# Altium PCB PCB_deskclok_ext_2021-02-23.pcbdoc
Units mil, origin at the board's own origin, x right, y up, seen from the top; angles counter-clockwise.
Board outline 1889.81 x 1925.91 mil, 2 copper layers (Top Layer, Bottom Layer); 36 components, 29 nets, 180 pads, 72 vias.
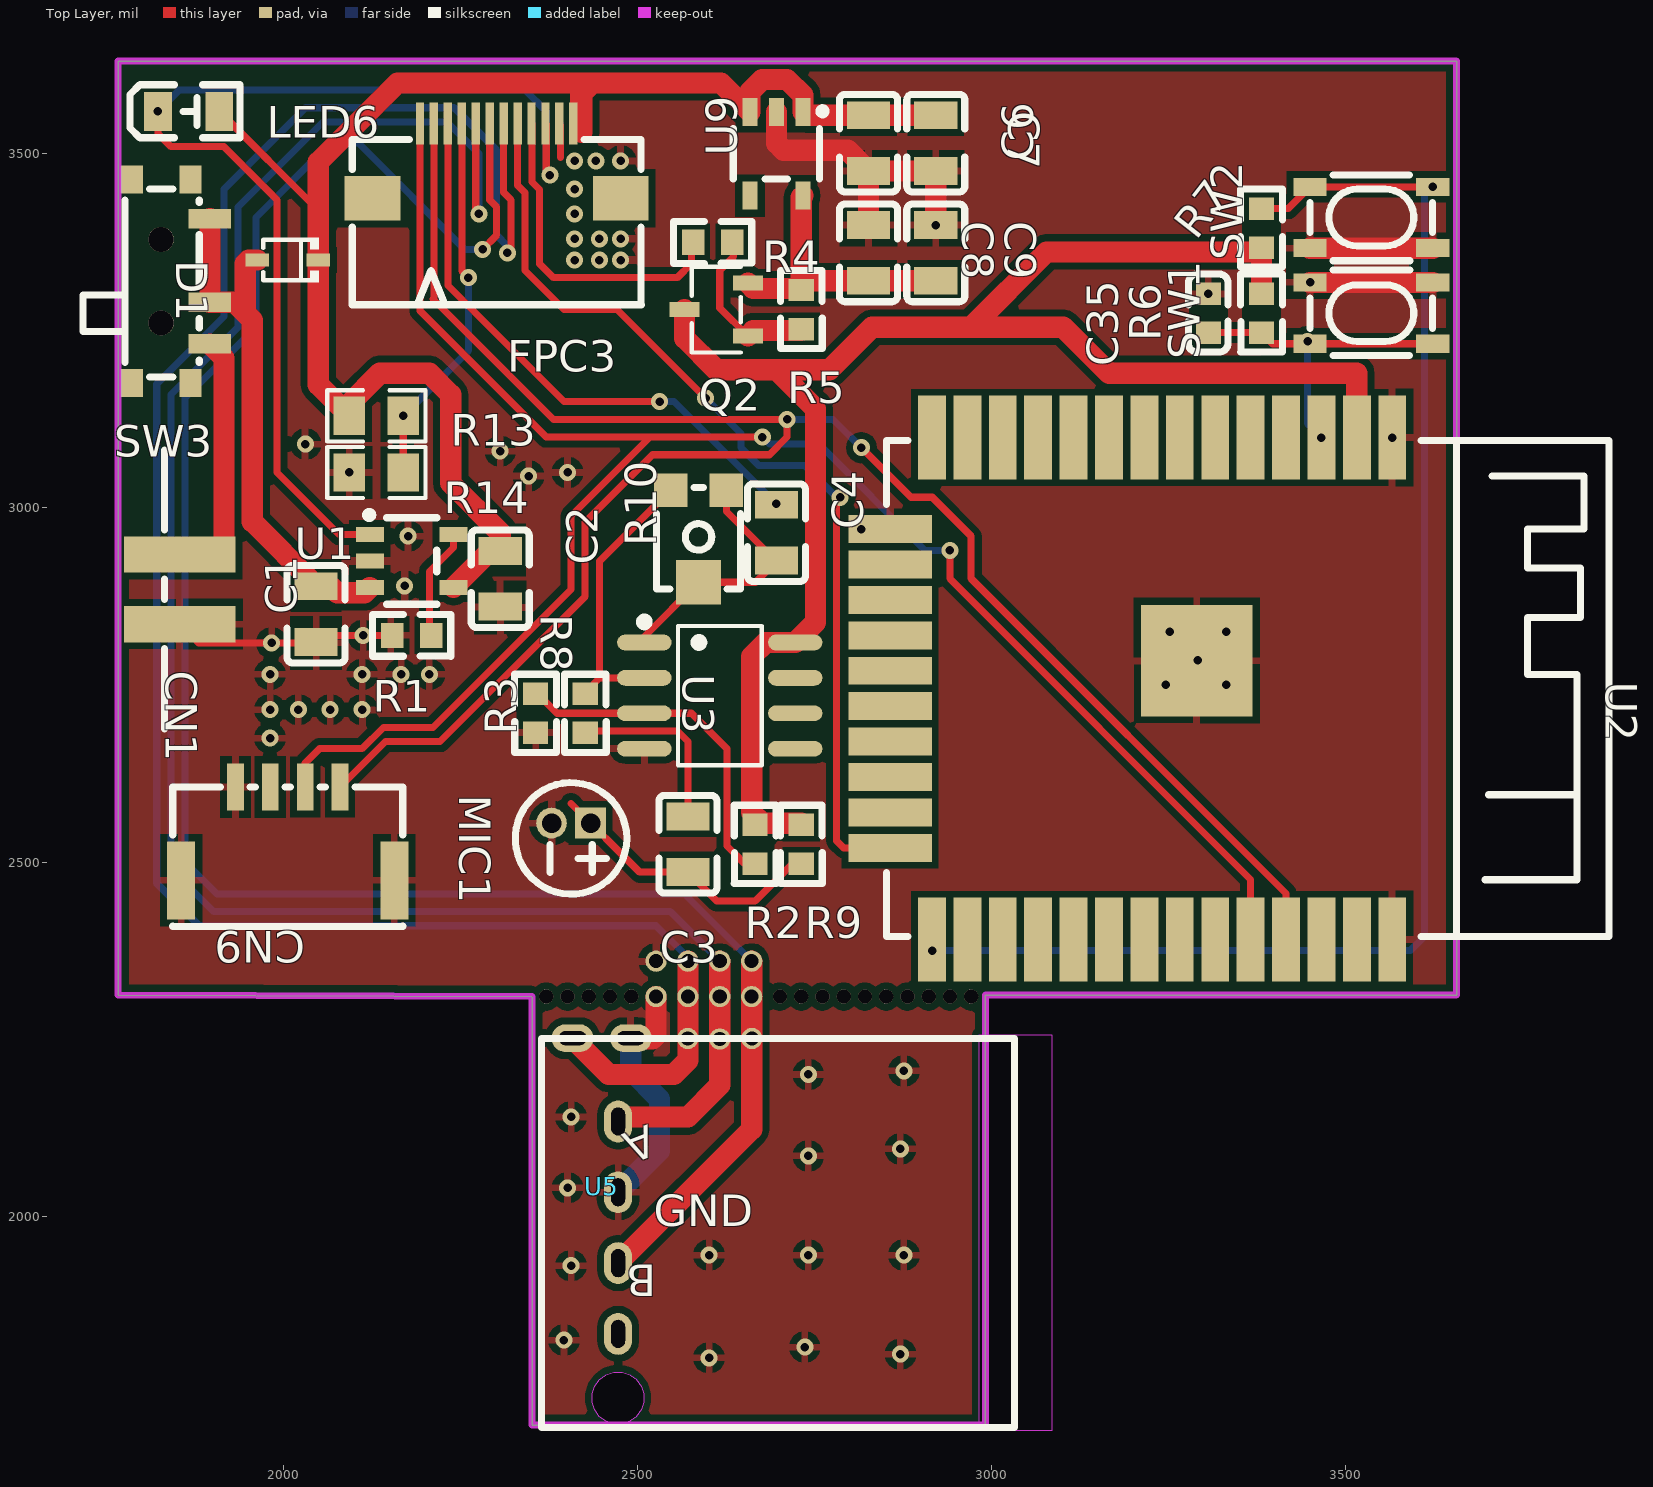
[diagram p0: Top Layer view]
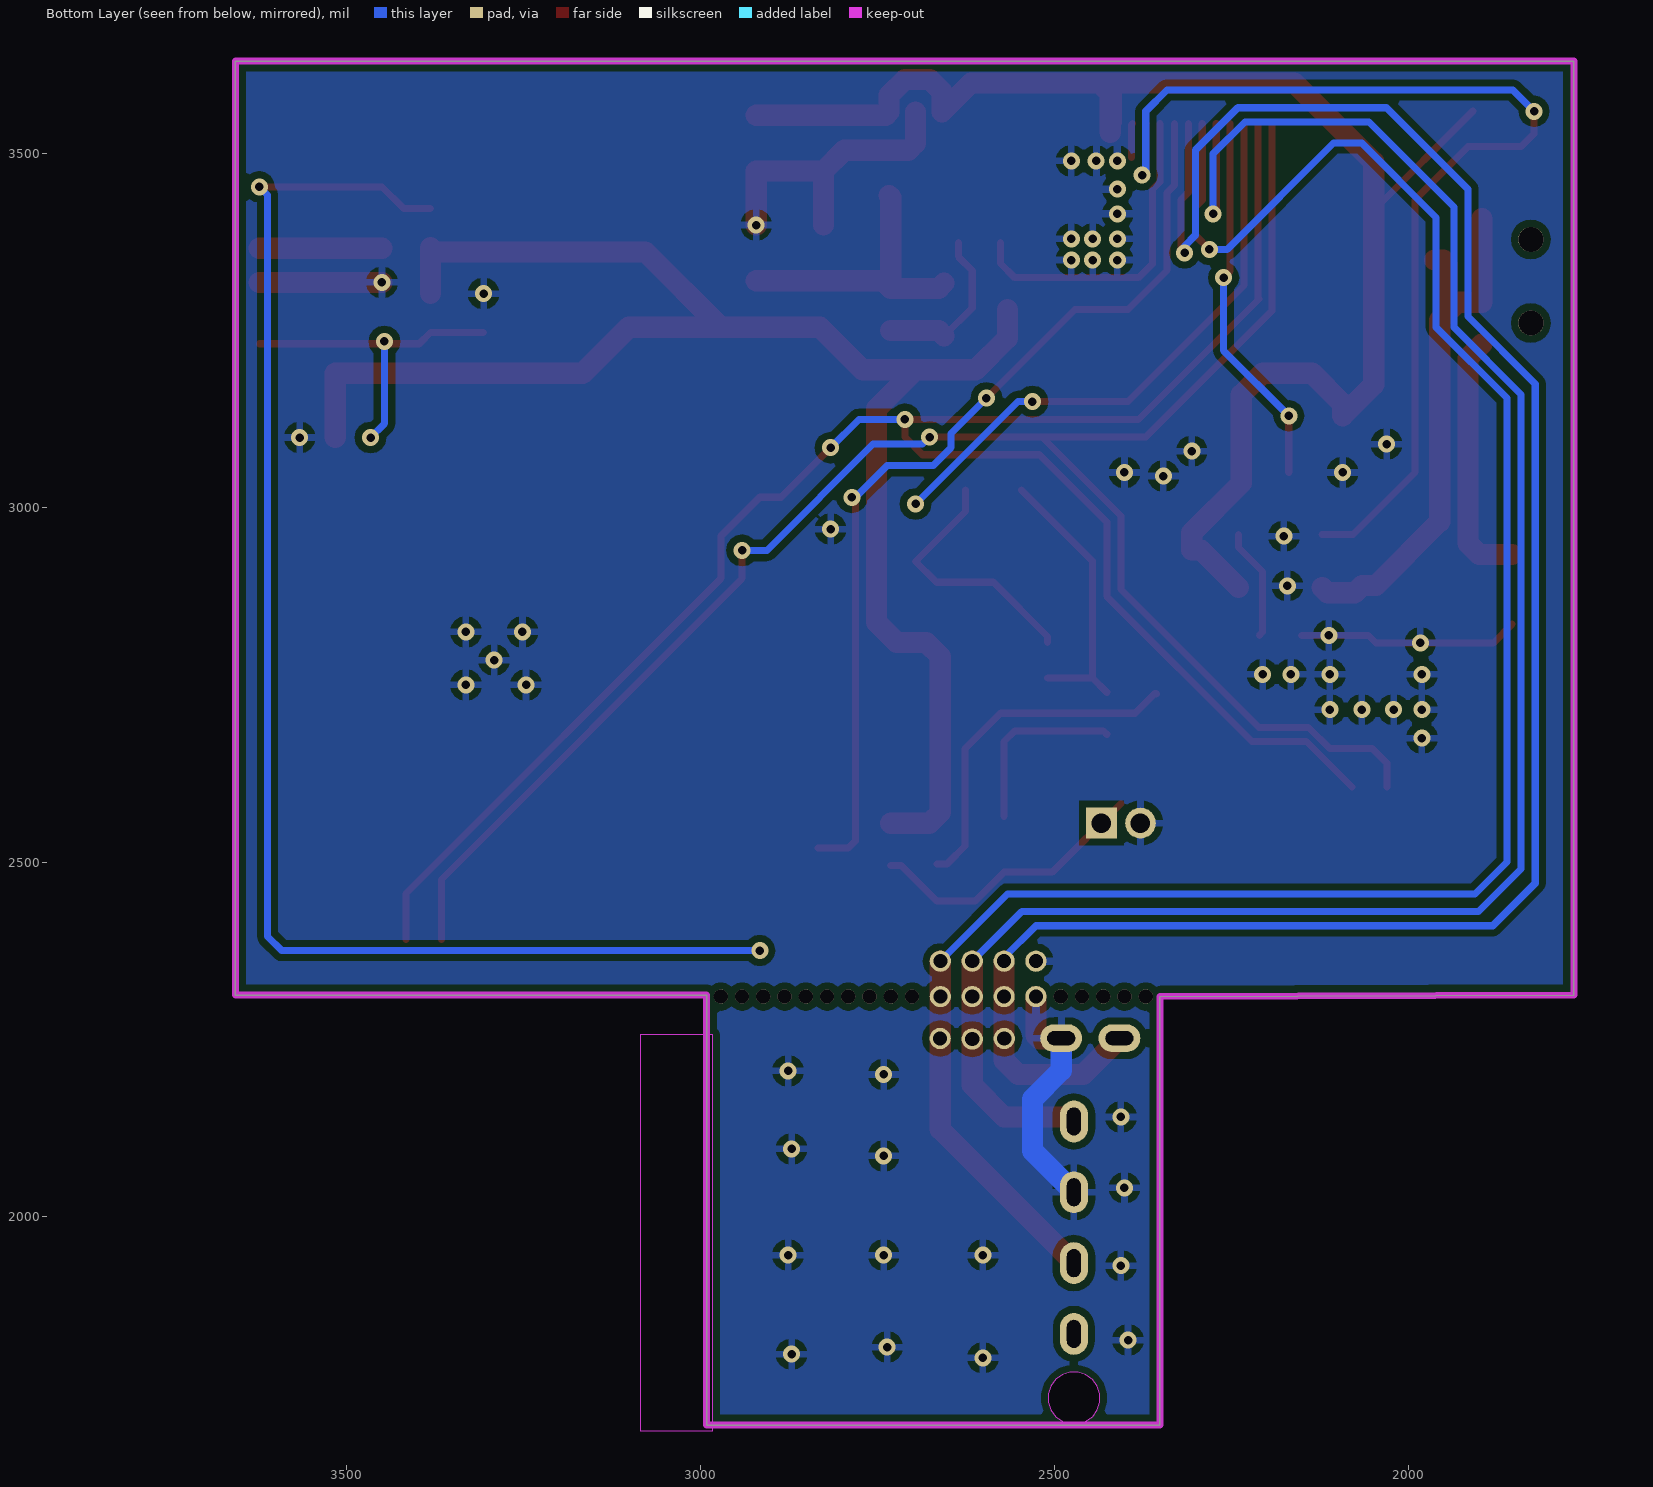
[diagram p1: Bottom Layer view, seen from below]
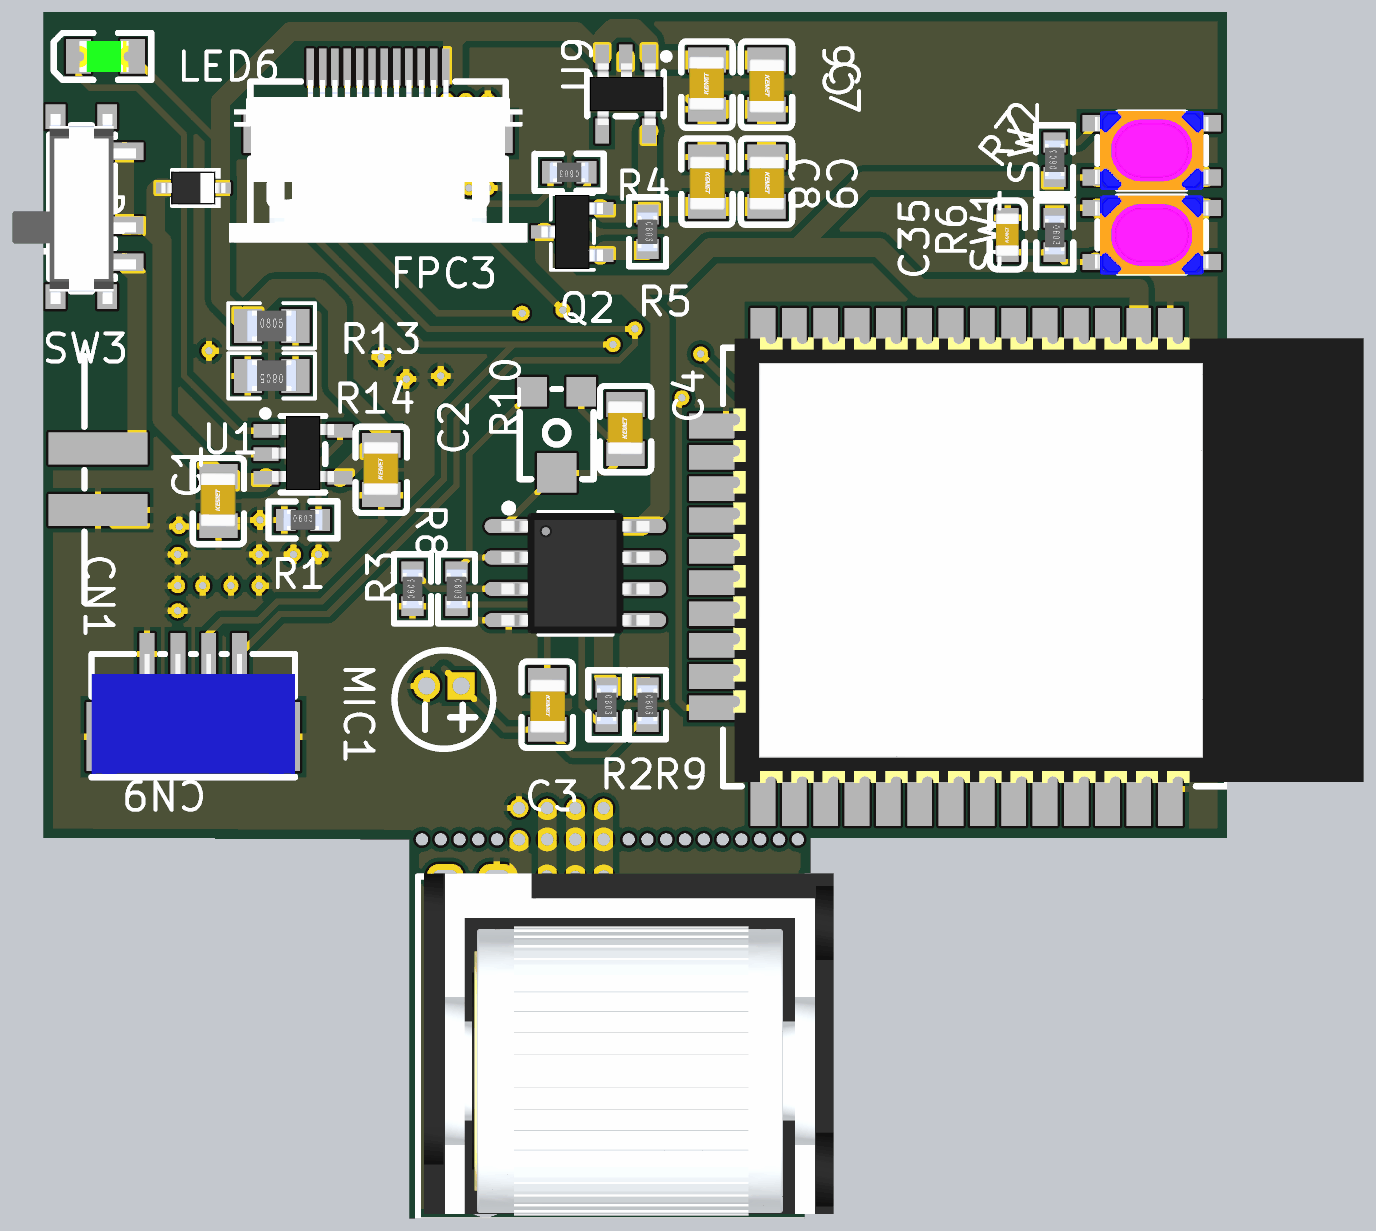
[diagram p2: 3D render of the assembled board from above, using the file's embedded part models]

## Layer stack, top to bottom
Top Solder: solder mask 0.4, Solder Resist, Dk 3.5
Top Layer: signal copper 1.4
Dielectric1: dielectric 12.6, FR-4, Dk 4.8
Bottom Layer: signal copper 1.4
Bottom Solder: solder mask 0.4, Solder Resist, Dk 3.5

## Board outline
1767.13,2312.01 2351.53,2310 2351.53,1705 2991.53,1705 2991.53,2312 3656.93,2312 3656.89,2312.01 3656.89,3630.91 1767.13,3630.91

## Design rules (kind name [scope] priority, off if disabled: settings)
Clearance [All] p1: gap=10 ignorepadtopadclearanceinfootprint=FALSE except(0: Arc-Hole Track-Hole SMDPad-Hole THPad-Hole Via-Hole Fill-Hole Poly-Hole Region-Hole Text-Hole)
PolygonConnect [All] p1: connectstyle=Relief reliefconductorwidth=10 reliefentries=4 polygonreliefangle="90 Angle" airgapwidth=10
RoutingVias [All] p1: holewidth=28 width=50 viastyle="Through Hole" minholewidth=28 minwidth=50 maxholewidth=28 maxwidth=50
SolderMaskExpansion [All] p1: expansion=4 istentingtop=FALSE
Width [All] p1: maxlimit=10 minlimit=10 preferedwidth=10
30 further rules are at their usual default settings.

## Components (designator, comment, footprint, x,y, rotation, side; value= is the part's Value field where it differs from the comment)
C1 "10uF" C0805 2046.54,2850 r90 top
C2 "10uF" C0805 2306.53,2900 r90 top
C3 "100nF" C0805 2571.53,2525 r270 top
C4 "4.7uF" C0805 2696.53,2965 r90 top
C6 "10uF" C0805 2826.53,3515 r90 top
C7 "100nF" C0805 2921.53,3515 r270 top
C8 "100nF" C0805 2826.53,3360 r270 top
C9 "10uF" C0805 2921.53,3360 r270 top
C35 "100nF" C0603 3306.53,3275 r90 top
CN1 "HX25003-2AWB" CONN-SMD_2P-P2.50_HX25003-2AWB 1716.54,2885 r270 top
CN9 "A1257WV-S-4P" CONN-SMD_A1257WV-S-4P 2006.54,2540 r0 top
D1 "BAT60B_C514095" SOD-323_L1.8-W1.3-LS2.5-RD 2006.54,3350 r180 top
FPC3 "AFC01-S12FCA-00" FPC-SMD_AFC01-S12FCA-00 2301.53,3490 r0 top
LED6 "D-G080508G1" LED0805-RD 1866.54,3560 r0 top
MIC1 "GMI4015P-2C-30DB" MIC-TH_BD4.0-P1.40-D0.4-L-FD 2406.53,2555 r180 top
Q2 "BLM3401" SOT-23-3_L2.9-W1.6-P1.90-LS2.8-BR 2611.53,3280 r0 top
R1 "1.5K" R0603 2181.53,2820 r0 top
R2 "10K" R0603 2666.53,2525 r270 top
R3 "10K" R0603 2356.53,2710 r90 top
R4 "1K" R0603 2606.53,3375 r180 top
R5 "10K" R0603 2731.53,3280 r270 top
R6 "10K" R0603 3381.53,3275 r270 top
R7 "10K" R0603 3381.53,3395 r90 top
R8 "1K" R0603 2426.53,2710 r270 top
R9 "2.2K" R0603 2731.53,2525 r270 top
R10 "50K" RES-ADJ-SMD_VG039NCH 2586.53,2960 r90 top
R13 "RT0805BRE07100KL" R0805 2131.53,3130 r180 top
R14 "RT0805BRE07100KL" R0805 2131.53,3050 r0 top
SW1 "K2-1808SN-A4SW" KEY-SMD_4P-L4.2-W3.2-P2.20-LS5.1-TL 3536.53,3275 r180 top
SW2 "K2-1808SN-A4SW" KEY-SMD_4P-L4.2-W3.2-P2.20-LS5.1-TL 3536.53,3410 r0 top
SW3 "MSS3-Q-T/R" SW-SMD_MSS3-Q-T-R 1841.54,3320 r270 top
U1 "TMI4054" SOT-23-5_L3.0-W1.7-P0.95-LS2.8-BR 2181.53,2925 r180 top
U2 "ESP32-S" WIRELM-SMD_ESP32-S 3211.53,2745 r270 top
U3 "LM358D" SOIC-8_L5.0-W4.0-P1.27-LS6.0-BL 2616.53,2735 r270 top
U5 "松下编码器" EVQWGD001 2701.53,1975 r0 top
U9 "RT9013-33GB" SOT-23-5_L3.0-W1.7-P0.95-LS2.8-BR 2696.53,3500 r90 top

## Footprints (in the part's own frame and the unit in brackets; to place one, negate y for a bottom-side part, rotate by r counter-clockwise, add the part's x,y. Pads: shape width x height; smd on the part's side, far side on the other; paste and mask are expansions set on the pad)
C0603 [mm]
  rect 0.8x0.9 smd: 1(-0.7,0) 2(0.7,0)
  silkscreen extent -1.4,-0.7 1.4,0.72, body extent -0.87,-0.47 0.9,0.48, height 0.95
C0805 [mm]
  rect 1x1.55 smd: 1(-1,0) 2(1,0)
  silkscreen extent -1.75,-1.04 1.75,1.04, body extent -1.04,-0.71 1.16,0.74, height 0.88
CONN-SMD_2P-P2.50_HX25003-2AWB [mm]
  rect 1.3x4 smd: 1(-1.25,3.5) 2(1.25,3.5)
  silkscreen extent -5,2.95 5,2.95
CONN-SMD_A1257WV-S-4P [mm]
  rect 0.6x1.7 smd: 1(1.875,1.675) 2(0.625,1.675) 3(-0.625,1.675) 4(-1.875,1.675)
  rect 1x2.8 smd: 5(3.825,-1.675) 6(-3.825,-1.675)
  silkscreen extent -4.12,-3.33 4.13,1.68, body extent -4.13,-3.18 4.12,1.68, height 4.38
EVQWGD001 [mm]
  oval 1x1.5 hole 0.5 slot 1 at 90 deg: 1(-5.807,4.03) 2(-5.807,1.49) 3(-5.807,-1.05) 4(-5.807,-3.59)
  oval 1.5x1 hole 0.5 slot 1 at 0 deg: 5(-7.438,7.015) 6(-5.348,7.015)
  Keep-Out Layer board cut-out: -4.882,-5.89 -4.883,-6.036 -4.974,-6.315 -5.146,-6.553 -5.384,-6.725 -5.663,-6.815 -5.957,-6.815 -6.236,-6.724 -6.473,-6.552 -6.646,-6.314 -6.736,-6.035 -6.736,-5.742 -6.646,-5.462 -6.473,-5.225 -6.236,-5.052 -5.957,-4.961 -5.663,-4.961 -5.384,-5.052 -5.146,-5.224 -4.974,-5.461 -4.883,-5.74 -4.882,-5.887 -4.882,-5.887 -4.882,-5.89
  Keep-Out Layer board cut-out: 7.139,7.139 9.753,7.139 9.753,-7.065 7.139,-7.065
  silkscreen extent -8.55,-6.94 8.42,7.01, body extent -8.3,-6.73 8.3,7.12, height 13.25
FPC-SMD_AFC01-S12FCA-00 [mil]
  rect 11.9x59.1 smd: 1(-108.28,52.78) 8(29.52,52.78)
  rect 11.8x59.1 smd: 2(-88.63,52.78) 3(-68.93,52.78) 4(-49.23,52.78) 5(-29.53,52.78) 6(-9.83,52.78) 7(9.87,52.78) 9(49.17,52.78) 10(68.87,52.78) 11(88.57,52.78) 12(108.27,52.78)
  rect 78.7x63 smd: 13(-175.2,-52.77) 14(175.2,-52.77)
  silkscreen extent -204,-203 205,30, body extent -238,-227 238,33, height 79
KEY-SMD_4P-L4.2-W3.2-P2.20-LS5.1-TL [mm]
  rect 1.2x0.65 smd: 1(-2.2,1.1) 2(2.2,1.1) 3(-2.2,-1.1) 4(2.2,-1.1)
  silkscreen extent -2.2,-1.55 2.2,1.52, body extent -2.3,-1.6 2.3,1.6, height 2.5
LED0805-RD [mm]
  rect 1x1.4 smd: 1(-1.1,0) 2(1.1,0)
  silkscreen extent -2.1,-0.95 1.85,0.95, body extent -1.07,-0.63 0.93,0.62, height 1.1
MIC-TH_BD4.0-P1.40-D0.4-L-FD [mm]
  rect 1.1x1.1 hole 0.7: 1(-0.7,0)
  round 1.1 hole 0.7: 2(0.7,0)
  silkscreen extent -2,-1.45 2,2.55
R0603 [mm]
  rect 0.8x0.9 smd: 1(-0.7,0) 2(0.7,0)
  silkscreen extent -1.4,-0.75 1.4,0.76, body extent -0.8,-0.4 0.8,0.4, height 0.42
R0805 [mil]
  rect 44.59x54.21 smd: 1(-38.04,0) 2(38.04,0)
  silkscreen extent -69,-36 69,36, body extent -39,-24 39,25, height 33
RES-ADJ-SMD_VG039NCH [mm]
  rect 1.2x1.2 smd: 1(1.65,-1) 3(1.65,1)
  rect 1.6x1.6 smd: 2(-1.65,0)
  silkscreen extent -1.9,-1.5 1.75,1.5
SOD-323_L1.8-W1.3-LS2.5-RD [mm]
  rect 0.845x0.455 smd: 1(-1.098,0) 2(1.098,0)
  silkscreen extent -1.1,-0.8 0.88,0.8, body extent -1.3,-0.67 1.3,0.68, height 1.1
SOIC-8_L5.0-W4.0-P1.27-LS6.0-BL [mil]
  oval 22.38x76.78 smd: 1(-75,-106.5) 2(-25,-106.5) 3(25,-106.5) 4(75,-106.5) 5(75,106.5) 6(25,106.5) 7(-25,106.5) 8(-75,106.5)
  silkscreen extent -110,-112 98,59, body extent -96,-118 96,118, height 67
SOT-23-3_L2.9-W1.6-P1.90-LS2.8-BR [mm]
  rect 1.07x0.532 smd: 1(1.135,-0.95) 2(1.135,0.95) 3(-1.135,0)
  silkscreen extent -0.88,-1.54 0.88,1.54, body extent -1.25,-1.5 1.25,1.5, height 1.08
SOT-23-5_L3.0-W1.7-P0.95-LS2.8-BR [mm]
  rect 1x0.55 smd: 1(1.5,-0.95) 2(1.5,0) 3(1.5,0.95) 4(-1.5,0.95) 5(-1.5,-0.95)
  silkscreen extent -0.9,-1.78 1.65,1.55, body extent -1.25,-1.54 1.25,1.46, height 1.11
SW-SMD_MSS3-Q-T-R [mm]
  rect 1x0.8 smd: 0(-3.65,-1.4) 0(-3.65,0.7) 0(3.65,-1.4) 0(3.65,0.7)
  rect 0.7x1.524 smd: 1(-2.25,1.4) 2(0.75,1.4) 3(2.25,1.4)
  round 0.9 hole 0.9 unplated: ""(-1.5,-0.35) ""(1.5,-0.35)
  silkscreen extent -3.3,-3.15 3.43,1.02, body extent -3.76,-3.14 3.94,1.86, height 1.4
WIRELM-SMD_ESP32-S [mm]
  rect 3x1 smd: 1(-9,9.005) 2(-9,7.735) 3(-9,6.465) 4(-9,5.195) 5(-9,3.925) 6(-9,2.655) 7(-9,1.385) 8(-9,0.115) 9(-9,-1.155) 10(-9,-2.425) 11(-9,-3.695) 12(-9,-4.965) 13(-9,-6.235) 14(-9,-7.505) 25(9,-7.505) 26(9,-6.235) 27(9,-4.965) 28(9,-3.695) 29(9,-2.425) 30(9,-1.155) 31(9,0.115) 32(9,1.385) 33(9,2.655) 34(9,3.925) 35(9,5.195) 36(9,6.465) 37(9,7.735) 38(9,9.005)
  rect 1x3 smd: 15(-5.715,-9.005) 16(-4.445,-9.005) 17(-3.175,-9.005) 18(-1.905,-9.005) 19(-0.635,-9.005) 20(0.635,-9.005) 21(1.905,-9.005) 22(3.175,-9.005) 23(4.445,-9.005) 24(5.715,-9.005)
  rect 4x4 smd: 39(-1,1.995)
  silkscreen extent -8.89,-9.13 8.89,16.78, body extent -9.31,-8.71 8.76,16.83, height 3

## Free pads (board coordinates)
  round 30 hole 20: 2(2526.53,2310) 2(2526.53,2360) 2(2571.31,2250.81) 2(2571.53,2310) 2(2571.53,2360) 2(2616.53,2250) 2(2616.53,2310) 2(2616.53,2360) 2(2661.53,2310) 2(2661.53,2360) 2(2661.81,2250.81)
  round 20 hole 20 unplated: ""(2371.53,2310) ""(2401.53,2310) ""(2431.53,2310) ""(2461.53,2310) ""(2491.53,2310) ""(2701.53,2310) ""(2731.53,2310) ""(2761.53,2310) ""(2791.53,2310) ""(2821.53,2310) ""(2851.53,2310) ""(2881.53,2310) ""(2911.53,2310) ""(2941.53,2310) ""(2971.53,2310)

## Via types
v1: diameter 24, hole 12, Top Layer to Bottom Layer, 72 vias

## Nets (pads, with @x,y where several pads share a name; then routed paths per layer and width w, separated by ;. In a path a pad name is that pad's centre, name@x,y a point inside that pad or via, vN(x,y) a via of type N, cw(c..) or ccw(c..) an arc to the next point about the centre after c; other vN are vias at no path point)
3V3: Q2.3 R2.1 R6.1 R7.1 R9.1 U2.2 U3.8 | length 2491.5
  Top Layer w30: Q2.3 2566.85,3239.68 2611.53,3195 2771.53,3195 2831.53,3255 2971.53,3255 ; 2660.22,3195 2696.53,3195 2751.53,3140 2751.53,2838.5 U3.8 2681.53,2810 2661.53,2790 2661.53,2570 2676.88,2554.66 R9.1@2731.53,2554.66 ; R6.1 R7.1 ; R7.1@3381.53,3361.47 3078.01,3361.47 2971.53,3255 ; U2.2@3516.03,3099.3 3516.03,3190 3166.53,3190 3101.53,3255 2971.53,3255
5V: C2.2 C6.2 C7.1 D1.1 FPC3.12 LED6.2 R13.2 U1.4 U9.1 U9.3 | length 2293.1
  Top Layer w10: LED6.2 2049.74,3420.1 D1.1 ; FPC3.12 2409.84,3583.3
  Top Layer w30: R13.2 2049.74,3173.75 2049.74,3488.21 2161.53,3600 2436.53,3600 ; R13.2 2093.53,3147 2136.53,3190 2206.53,3190 2236.53,3160 2236.53,3035 2306.53,2965 2306.53,2940.55 2293.55,2940.55 U1.4 ; 2421.53,3530 2421.53,3585 2436.53,3600 ; U9.3@2659.13,3559.05 2659.13,3587.6 2676.53,3605 2711.53,3605 2733.93,3582.6 2733.93,3559.05 2738.61,3554.37 C7.1 ; U9.3@2659.14,3559.1 2618.24,3600 2436.53,3600
ADC1_IN4: C4.2 FPC3.3 | length 820.5
  Top Layer w10: FPC3.3 2232.6,3313.93 2396.53,3150 v1(2531.53,3150)
  Bottom Layer w10: v1(2531.53,3150) 2552.08,3150 v1@2696.53,3005.55
  other v1: 2696.53,3005.55
ADC1_IN5: FPC3.4 R13.1 R14.2 | length 534.7
  Top Layer w10: R14.2 v1(2169.57,3130) ; FPC3.4 2252.3,3334.23 v1(2261.53,3325)
  Bottom Layer w10: v1(2169.57,3130) 2261.53,3221.96 v1(2261.53,3325)
C1_2: C1.2 D1.2 SW3.1 SW3.2 U1.3 | length 786.7
  Top Layer w30: SW3.1 SW3.2 1931.07,3290.47 1956.54,3265 ; D1.2 1951.54,3350 1946.54,3345 1946.54,3275 1956.54,3265 ; U1.3 2114.89,2880 2076.53,2880 2065.99,2890.55 2046.54,2890.55 1956.54,2980.55 1956.54,3265
C3_1: C3.1 R8.2 | length 258.8
  Top Layer w10: R8.2@2426.53,2680.34 2431.2,2685 2556.53,2685 2571.53,2670 C3.1
CN1_1: CN1.1 SW3.3 | length 358.4
  Top Layer w30: CN1.1 1900.73,2934.2 1916.54,2950 1916.54,3211.5 SW3.3@1896.63,3231.4
GND: C1.1 C2.1 C6.1 C7.2 C8.1 C9.1 C35.2 CN1.2 CN9.4 CN9.5 CN9.6 FPC3.11 MIC1.2 pad.2@2526.53,2310 pad.2@2526.53,2360 R1.1 R3.1 R14.1 SW1.3 SW1.4 SW2.3 SW2.4 U1.2 U2.1 U2.15 U2.38 U2.39 U3.4 U5.2 U5.6 U9.2 | length 1497.2
  Top Layer w10: CN1.2 1880.66,2809.45 v1(1983.89,2809.45) 2046.54,2809.45 2057.09,2820 v1(2112.89,2820) R1.1@2151.88,2820 ; FPC3.11 2391.53,3541.3 2391.53,3495
  Top Layer w30: U5.6 2492.16,2250 2521.53,2250 2526.53,2255 pad.2@2526.53,2310 ; U9.2@2696.53,3559.05 2696.53,3515 2706.53,3505 2797.16,3505 C6.1 ; C8.1 C6.1 ; v1(2921.53,3399.37) C7.2 C6.1 ; v1(3449.93,3318.3) SW1.3 ; SW2.3 SW2.4
  Bottom Layer w30: U5.2 2531.53,2092.28 2531.53,2165 2490.98,2205.55 U5.6
  other v1: 2601.53,1800 2871.53,1805 2736.53,1815 2396.53,1825 2406.53,1930 2601.53,1945 2741.53,1945 2876.53,1945 2401.53,2040 2741.53,2085 2871.53,2095 2406.53,2140 2741.53,2200 2876.53,2205 1981.54,2675 1981.54,2715 2021.54,2715 2066.53,2715 2111.53,2715 3246.53,2750 3331.53,2750 1981.54,2765 2111.53,2765 2166.53,2765 2206.53,2765 3291.53,2785 3251.53,2825 3331.53,2825 2171.53,2890 2176.53,2960 2816.53,2970 2346.53,3045 2093.49,3050 2401.53,3050 2306.53,3080 2031.54,3090 3566.07,3099.33 3306.53,3302.55 2411.53,3350 2446.53,3350 2476.53,3350 2411.53,3380 2446.53,3380 2476.53,3380 2411.53,3415 2411.53,3450 2411.53,3490 2441.53,3490 2476.53,3490
IO0: R7.2 SW2.1 SW2.2 U2.25 | length 2020.7
  Top Layer w10: R7.2 3419.19,3422.56 SW2.1 ; SW2.1 v1(3623.14,3453.3)
  Bottom Layer w10: v1(2916.53,2375) 3591.53,2375 3611.53,2395 3611.53,3441.7 v1(3623.14,3453.3)
MIC1_1: C3.2 MIC1.1 R9.2 | length 402.8
  Top Layer w10: 2406.53,2582.56 2503.47,2485.63 C3.2 2612.16,2445 2666.53,2445 2716.88,2495.34 R9.2@2731.53,2495.34
PB0: FPC3.7 pad.2@2571.31,2250.81 pad.2@2571.53,2310 pad.2@2571.53,2360 U5.5 | length 2947.9
  Top Layer w10: FPC3.7 2311.43,3445.1 2321.53,3435 2321.53,3365 v1(2316.53,3360)
  Top Layer w30: U5.5 2459.88,2200 2551.53,2200 2571.53,2220 2571.53,2310 pad.2@2571.53,2360
  Bottom Layer w10: v1(2316.53,3360) 2316.53,3370 2301.53,3385 2301.53,3505 2241.53,3565 2031.54,3565 1916.54,3450 1916.54,3270 1821.54,3175 1821.54,2470 1881.54,2410 2526.53,2410 2571.53,2365 pad.2@2571.53,2360
PB1: FPC3.8 U2.24 | length 1345
  Top Layer w10: FPC3.8@2331.04,3542.8 2331.04,3455.5 2341.53,3445 2341.53,3335 2396.53,3280 2471.53,3280 v1(2596.53,3155) ; v1(2786.53,3015) 2781.53,3010 2781.53,2530 2791.53,2520 U2.24@2833.91,2520
  Bottom Layer w10: v1(2596.53,3155) 2646.53,3105 2646.53,3085 2666.53,3065 2671.53,3060 2736.53,3060 2781.53,3015 v1(2786.53,3015)
PB2: FPC3.9 R4.2 | length 463.6
  Top Layer w10: FPC3.9@2351.53,3542.8 2351.53,3460 2361.84,3449.7 2361.84,3344.7 2381.53,3325 2556.53,3325 2576.84,3345.3 R4.2@2576.84,3375
PB10: FPC3.10 LED6.1 U1.1 | length 1531.4
  Top Layer w10: v1(1823.22,3560) 1823.22,3528.31 1841.54,3510 1916.54,3510 1991.54,3435 1991.54,3050 2079.14,2962.4 U1.1 ; FPC3.10 2371.53,3541.64 2371.53,3475 v1(2376.53,3470)
  Bottom Layer w10: v1(1823.22,3560) 1853.23,3590 2341.53,3590 2371.53,3560 2371.53,3475 v1(2376.53,3470)
Q2_1: Q2.1 R4.1 R5.2 | length 235.5
  Top Layer w10: R4.1@2636.2,3375 2636.2,3354.66 2616.53,3335 2616.53,3282.28 Q2.1
  Top Layer w30: Q2.1 2663.96,3250.34 R5.2@2731.53,3250.34
Q2_2: C8.2 C9.2 Q2.2 R5.1 U9.5 | length 405.3
  Top Layer w30: Q2.2 2663.96,3309.66 R5.1@2731.53,3309.66 ; U9.5 2731.53,3438.55 R5.1@2731.53,3309.66 ; C9.2 2742.51,3320.63 R5.1@2731.53,3309.66
R1_2: R1.2 U1.5 | length 158.4
  Top Layer w10: R1.2@2211.2,2820 2206.53,2824.66 2206.53,2910 2240.59,2944.06 U1.5
RST: C35.1 R6.2 SW1.1 SW1.2 U2.3 | length 466.9
  Top Layer w10: C35.1 R6.2 3397.28,3231.7 SW1.2 SW1.1
  Bottom Layer w10: v1(3446.53,3235) 3446.53,3118.86 v1(3466.07,3099.33)
RXD: CN9.2 FPC3.1 U2.34 | length 2649.8
  Top Layer w10: CN9.2 2031.14,2639.61 2051.53,2660 2111.53,2660 2141.53,2690 2211.53,2690 2406.53,2885 2406.53,2988.75 2517.78,3100 ; FPC3.1 2193.26,3278.28 2371.53,3100 v1(2676.53,3100) ; v1(2941.53,2940) 2941.53,2900 3366.03,2475.5 U2.34@3366.03,2390.7
  Bottom Layer w10: v1(2676.53,3100) 2686.53,3090 2756.53,3090 2906.53,2940 v1(2941.53,2940)
S$68: 
S$2271: 
S$2276: 
S$2278: 
TIM3_CH1: FPC3.5 pad.2@2616.53,2250 pad.2@2616.53,2310 pad.2@2616.53,2360 U5.1 | length 2766.1
  Top Layer w10: FPC3.5 2272,3419.53 v1(2276.53,3415)
  Top Layer w30: U5.1 2479.25,2140 2571.53,2140 2616.53,2185 2616.53,2310 pad.2@2616.53,2360
  Bottom Layer w10: v1(2276.53,3415) 2276.53,3500 2231.53,3545 2056.53,3545 1936.54,3425 1936.54,3255 1841.54,3160 1841.54,2490 1901.54,2430 2546.53,2430 pad.2@2616.53,2360
TIM3_CH2: FPC3.6 pad.2@2661.53,2310 pad.2@2661.53,2360 pad.2@2661.81,2250.81 U5.3 | length 2929.7
  Top Layer w10: v1(2281.53,3365) 2301.53,3385 2301.53,3425 2291.74,3434.8 FPC3.6
  Top Layer w30: U5.3 2661.53,2122.28 2661.53,2310 pad.2@2661.53,2360
  Bottom Layer w10: v1(2281.53,3365) 2256.53,3365 2106.53,3515 2066.53,3515 1961.54,3410 1961.54,3255 1861.54,3155 1861.54,2500 1906.54,2455 2566.53,2455 pad.2@2661.53,2360
TXD: CN9.1 FPC3.2 U2.35 | length 2822.9
  Top Layer w10: CN9.1 2144.41,2670 2221.53,2670 2426.53,2875 2426.53,2980 2521.53,3075 2686.53,3075 2711.53,3100 v1(2711.53,3125) 2381.53,3125 2211.53,3295 2212.91,3296.37 FPC3.2 ; v1(2816.53,3085) 2886.53,3015 2916.53,3015 2971.53,2960 2971.53,2900 3416.03,2455.5 U2.35@3416.03,2390.7
  Bottom Layer w10: v1(2711.53,3125) 2776.53,3125 v1(2816.53,3085)
U3_1: C4.1 R10.1 R10.2 U3.1 | length 368.7
  Top Layer w10: U3.1 2510.03,2818.54 R10.2 2667.12,2895.04 2696.53,2924.45 2625.91,2995.08 R10.1
U3_2: R8.1 R10.3 U3.2 | length 398.4
  Top Layer w10: R8.1@2426.53,2739.66 2446.88,2760 ; U3.2 2446.88,2760 ; R10.3 2446.88,2924.67 2446.88,2760
U3_3: R2.2 R3.2 U3.3 | length 490
  Top Layer w10: R3.2 2358.97,2737.56 2386.53,2710 U3.3 2576.53,2710 2626.53,2660 2626.53,2522.6 2651.7,2497.44 R2.2
pads on no net: CN9.3 FPC3.13 FPC3.14 SW3. SW3.0 U2.4 U2.5 U2.6 U2.7 U2.8 U2.9 U2.10 U2.11 U2.12 U2.13 U2.14 U2.16 U2.17 U2.18 U2.19 U2.20 U2.21 U2.22 U2.23 U2.26 U2.27 U2.28 U2.29 U2.30 U2.31 U2.32 U2.33 U2.36 U2.37 U3.5 U3.6 U3.7 U5.4 U9.4

## Polygon pours and split planes (outlines as drawn)
GND on Top Layer "Top Layer-GND" (solid, remove dead copper, pour order 0): 1661.54,3825 1626.54,3790 1626.54,1500 1676.54,1550 4326.53,1550 4236.53,1640 4236.53,3990
GND on Bottom Layer "Bottom Layer-GND" (solid, remove dead copper, pour order 1): 1551.54,3730 1581.54,3700 1581.54,2075 1591.54,2065 1591.54,1555 1601.54,1545 4041.53,1545 4076.53,1580 4076.53,3855

## Text inside footprints (layer, text, board x,y; h text height)
U5: Top Overlay "B" at 2526.93,1931.56 h45 r180; Top Overlay "GND" at 2523.58,1985.77 h45; Top Overlay "A" at 2515.52,2130.06 h45 r201